# Altium PCB 400902.PcbDoc (part 2 of 2)
Units mm, origin at the board's own origin, x right, y up, seen from the top; angles counter-clockwise.
Board outline 45.72 x 50.8 mm, 4 copper layers (Top Layer, Mid-Layer 1, Mid-Layer 2, Bottom Layer), stack 1.564 mm thick; 61 components, 50 nets, 204 pads, 509 vias.
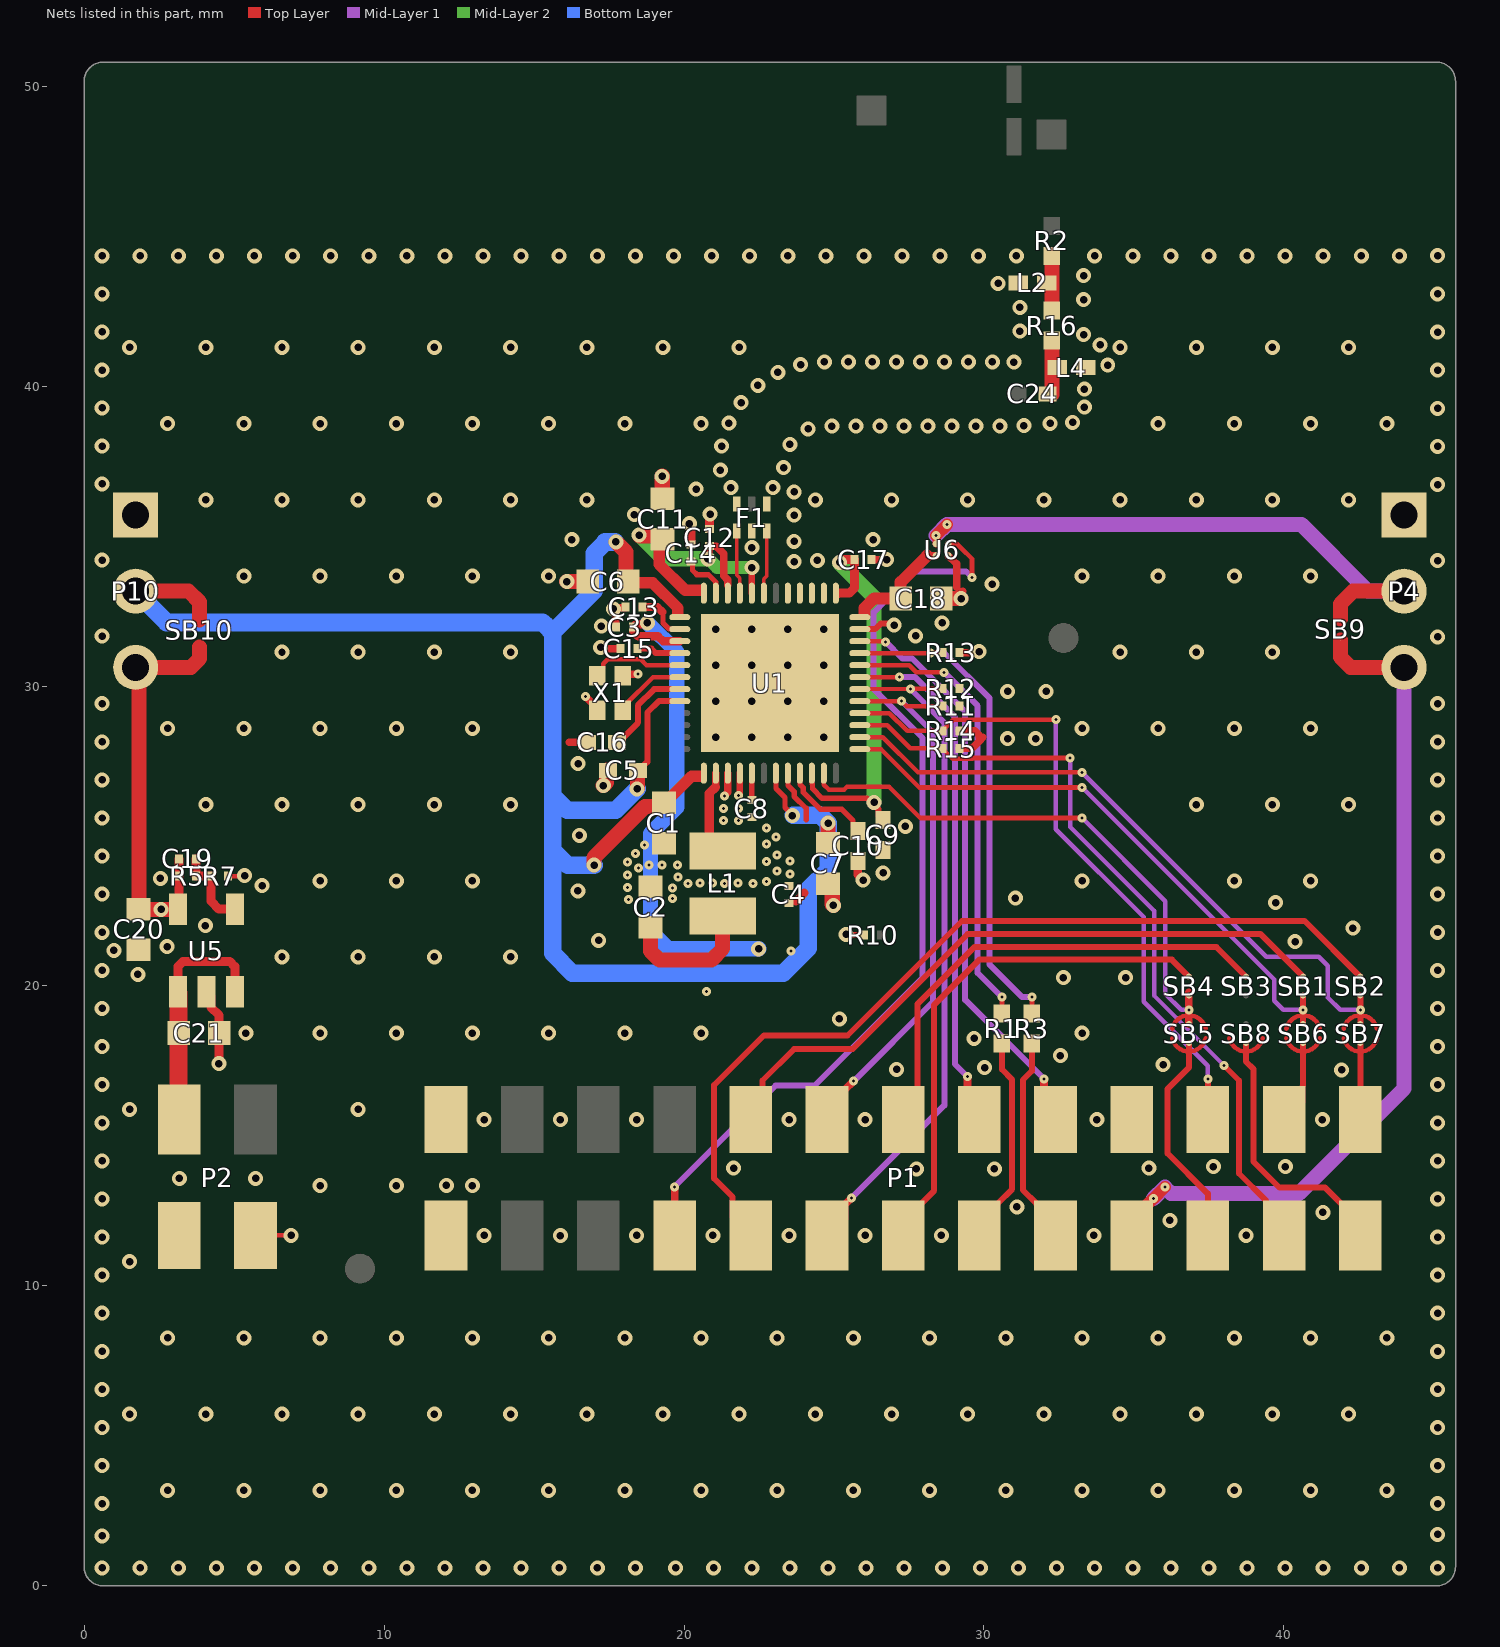
[diagram p4: the nets of this part, all layers, seen from the top]

## Via types
v1: diameter 0.5, hole 0.25, Top Layer to Bottom Layer, tented both sides, 439 vias
v2: diameter 0.3, hole 0.1, Top Layer to Mid-Layer 1, tented both sides, 70 vias

## Nets (pads, with @x,y where several pads share a name; then routed paths per layer and width w, separated by ;. In a path a pad name is that pad's centre, name@x,y a point inside that pad or via, vN(x,y) a via of type N, cw(c..) or ccw(c..) an arc to the next point about the centre after c; other vN are vias at no path point) (continued)
GND: C1.1 C2.1 C3.1 C4.1 C5.1 C6.1 C7.2 C8.2 C9.1 C10.2 C11.1 C12.2 C13.1 C14.1 C15.1 C16.1 C17.1 C18.1 C20.1 C21.1 F1.2 F1.5 F1.7 L2.1 L4.1 P1.2 P1.19 P2.2 P2.4 P4.1 P10.1 R7.1 R10.2 R11.2 R12.2 R13.1 R14.2 R15.2 U1.2 U1.3 U1.4 U1.5 U1.27 U1.28 U1.47 U1.49 U5.2 U6.B1 X1.2 X1.4 | length 21.3
  Top Layer w0.15: P2.4@5.715,11.684 v1(6.905,11.684)
  Top Layer w0.152: R7.1@4.803,23.665 5.343,23.665 v1@5.368,23.69
  Top Layer w0.2: v1(25.403,21.719) 25.415,21.706 25.988,21.706 R10.2@26.001,21.694 ; U1.47@25.86,31.895 26.371,31.895 26.553,32.076 26.959,32.076 v1(27.008,32.027)
  Top Layer w0.229: v2(21.82,26.355) 21.83,26.355 21.86,26.385 U1.28@21.86,27.095
  Top Layer w0.25: 16.18,28.121 C16.1@16.643,28.121 ; v2(16.719,29.65) 16.719,29.642 17.106,29.255 X1.2@17.156,29.255 ; C3.1@17.733,31.959 17.723,31.969 17.723,32.428 17.644,32.508 v1(17.644,32.575) 17.669,32.601 18.036,32.601 18.046,32.611 C13.1@18.046,32.626 ; X1.4@17.964,30.397 v2(18.46,30.397) ; v2(21.355,26.336) 21.355,26.349 21.46,26.454 U1.27@21.46,27.095 ; C10.2@25.794,24.167 25.781,24.153 25.781,23.713 ; C10.2@25.812,24.271 25.812,23.744 25.781,23.713 ; v1(25.969,23.525) 25.781,23.713 ; C17.1@26.256,34.217 v1(26.753,34.217) ; U6.B1@28.808,34.344 29.084,34.068 29.084,33.3 ; R15.2@29.179,27.925 29.609,27.925 29.89,28.206 29.89,28.254 29.845,28.299 ; R14.2@29.179,28.503 29.688,28.503 29.787,28.405 ; v1(29.235,32.917) 29.283,32.965 29.283,33.142 v1@29.297,33.155 ; R13.1@29.243,31.114 29.805,31.114 v1(29.837,31.145) ; 29.787,28.405 29.893,28.299 29.96,28.299
  Top Layer w0.254: v1(17.221,31.292) 17.268,31.245 C15.1@17.877,31.245
  Top Layer w0.3: U5.2@4.075,19.8 4.225,19.65 4.225,19.291 4.5,19.016 4.5,17.422 v1(4.493,17.415)
  Top Layer w0.305: v1(20.181,35.411) 20.181,35.358 20.23,35.31 20.23,34.78 C14.1@20.232,34.778 ; C12.2@20.848,35.274 20.848,35.713 v1(20.868,35.733)
  Top Layer w0.508: v1(16.092,33.481) C6.1@16.786,33.481 ; v1(17.311,26.683) 17.416,26.788 17.416,27.187 17.42,27.191 C5.1@17.462,27.191 ; v1(19.272,36.991) 19.272,36.252 C11.1@19.285,36.238 ; C7.2@24.796,23.408 24.821,23.408 24.942,23.287 24.942,22.727 v1(24.983,22.686) ; C18.1@28.573,32.917 v1(29.235,32.917)
  other v1: 0.6,0.6 1.87,0.6 3.14,0.6 4.41,0.6 5.68,0.6 6.95,0.6 8.22,0.6 9.49,0.6 10.76,0.6 12.03,0.6 13.3,0.6 14.57,0.6 15.84,0.6 17.11,0.6 18.38,0.6 19.72,0.6 20.99,0.6 22.26,0.6 23.53,0.6 24.8,0.6 26.07,0.6 27.34,0.6 28.61,0.6 29.88,0.6 31.15,0.6 32.42,0.6 33.69,0.6 34.96,0.6 36.23,0.6 37.5,0.6 38.77,0.6 40.04,0.6 41.31,0.6 42.58,0.6 43.85,0.6 45.12,0.6 0.6,1.67 45.12,1.72 0.6,2.74 45.12,2.74 2.788,3.187 5.328,3.187 7.868,3.187 10.408,3.187 12.948,3.187 15.488,3.187 18.028,3.187 20.568,3.187 23.108,3.187 25.648,3.187 28.188,3.187 30.728,3.187 33.268,3.187 35.808,3.187 38.348,3.187 40.888,3.187 43.428,3.187 0.6,4.01 45.12,4.01 0.6,5.28 45.12,5.28 1.518,5.727 4.058,5.727 6.598,5.727 9.138,5.727 11.678,5.727 14.218,5.727 16.758,5.727 19.298,5.727 21.838,5.727 24.378,5.727 26.918,5.727 29.458,5.727 31.998,5.727 34.538,5.727 37.078,5.727 39.618,5.727 42.158,5.727 0.6,6.55 45.12,6.55 0.6,7.82 45.12,7.82 2.788,8.267 5.328,8.267 7.868,8.267 10.408,8.267 12.948,8.267 15.488,8.267 18.028,8.267 20.568,8.267 23.108,8.267 25.648,8.267 28.188,8.267 30.728,8.267 33.268,8.267 35.808,8.267 38.348,8.267 40.888,8.267 43.428,8.267 0.6,9.09 45.12,9.09 0.6,10.36 45.12,10.36 1.518,10.807 0.6,11.63 45.12,11.63 15.875,11.675 13.34,11.684 18.42,11.684 20.96,11.684 23.5,11.684 26.04,11.684 28.58,11.684 33.66,11.684 38.74,11.684 36.2,12.184 41.3,12.45 31.095,12.634 0.6,12.9 45.12,12.9 7.868,13.347 10.408,13.347 12.075,13.35 12.948,13.347 3.175,13.584 5.715,13.584 27.75,13.9 30.35,13.9 21.65,13.925 35.5,13.925 37.65,13.975 40.05,13.975 0.6,14.17 45.12,14.17 0.6,15.44 45.12,15.44 13.34,15.545 15.88,15.545 18.42,15.545 23.5,15.545 26.04,15.545 33.76,15.545 41.28,15.545 1.518,15.887 9.138,15.887 0.6,16.71 45.12,16.71 27.088,17.219 41.925,17.2 30.025,17.275 35.975,17.375 32.55,17.675 0.6,17.98 45.12,17.98 29.675,18.25 5.393,18.427 7.868,18.427 10.408,18.427 12.948,18.427 15.488,18.427 18.028,18.427 20.568,18.427 33.268,18.427 25.175,18.9 0.6,19.25 45.12,19.25 32.65,20.275 34.725,20.275 1.795,20.385 0.6,20.52 45.12,20.52 6.598,20.967 9.138,20.967 11.678,20.967 14.218,20.967 0.993,21.19 2.768,21.315 40.375,21.475 17.156,21.517 0.6,21.79 45.12,21.79 42.3,21.925 4.043,22.015 39.725,22.775 31.05,22.925 0.6,23.06 45.12,23.06 16.462,23.167 5.933,23.347 7.868,23.507 10.408,23.507 12.948,23.507 33.268,23.507 38.348,23.507 40.888,23.507 2.543,23.59 5.355,23.677 26.641,23.769 0.6,24.33 45.12,24.33 16.513,25.021 27.381,25.323 0.6,25.6 45.12,25.6 4.058,26.047 6.598,26.047 9.138,26.047 11.678,26.047 14.218,26.047 37.078,26.047 39.618,26.047 42.158,26.047 0.6,26.87 45.12,26.87 16.47,27.415 0.6,28.14 45.12,28.14 30.784,28.249 31.725,28.25 21.06,28.295 22.26,28.295 23.46,28.295 24.66,28.295 2.788,28.587 5.328,28.587 7.868,28.587 10.408,28.587 12.948,28.587 33.268,28.587 35.808,28.587 38.348,28.587 40.888,28.587 0.6,29.41 45.12,29.41 21.06,29.495 22.26,29.495 23.46,29.495 24.66,29.495 30.784,29.819 32.075,29.825 21.06,30.695 22.26,30.695 23.46,30.695 24.66,30.695 6.598,31.127 9.138,31.127 11.678,31.127 14.218,31.127 34.538,31.127 37.078,31.127 39.618,31.127 45.12,31.64 0.6,31.665 27.725,31.675 21.06,31.895 22.26,31.895 23.46,31.895 24.66,31.895 17.242,31.993 28.603,32.109 30.269,33.4 5.328,33.667 7.868,33.667 10.408,33.667 12.948,33.667 15.488,33.667 33.268,33.667 35.808,33.667 38.348,33.667 40.888,33.667 23.669,34.15 45.12,34.18 0.6,34.2 24.444,34.192 22.26,34.615 23.669,34.825 16.259,34.876 26.302,34.878 23.669,35.7 18.344,35.717 4.058,36.207 6.598,36.207 9.138,36.207 11.678,36.207 14.218,36.207 16.758,36.207 24.378,36.207 26.918,36.207 29.458,36.207 31.998,36.207 34.538,36.207 37.078,36.207 39.618,36.207 42.158,36.207 23.669,36.475 20.407,36.56 21.56,36.615 22.96,36.615 45.12,36.715 0.6,36.735 21.211,37.2 23.32,37.279 45.12,37.99 0.6,38 21.254,37.999 23.527,38.052 24.135,38.572 24.93,38.667 25.73,38.667 26.53,38.667 27.33,38.667 28.13,38.667 28.93,38.667 29.73,38.667 30.53,38.667 31.329,38.677 2.788,38.747 5.328,38.747 7.868,38.747 10.408,38.747 12.948,38.747 15.488,38.747 18.028,38.747 20.568,38.747 32.201,38.754 35.808,38.747 38.348,38.747 40.888,38.747 43.428,38.747 21.495,38.762 32.954,38.792 45.12,39.26 0.6,39.27 33.35,39.3 21.9,39.452 33.344,39.9 22.459,40.024 23.13,40.459 0.6,40.535 45.12,40.53 34.126,40.702 23.887,40.717 24.682,40.808 25.482,40.808 26.282,40.808 27.082,40.808 27.882,40.808 28.682,40.808 29.482,40.808 30.282,40.808 30.994,40.798 1.518,41.287 4.058,41.287 6.598,41.287 9.138,41.287 11.678,41.287 14.218,41.287 16.758,41.287 19.298,41.287 21.838,41.287 34.538,41.287 37.078,41.287 39.618,41.287 42.158,41.287 33.875,41.375 33.321,41.713 0.6,41.805 45.12,41.795 31.199,41.829 31.2,42.625 33.318,42.884 0.6,43.07 45.12,43.07 30.469,43.425 33.318,43.684 0.6,44.34 1.87,44.34 3.14,44.34 4.41,44.34 5.68,44.34 6.95,44.34 8.22,44.34 9.49,44.34 10.76,44.34 12.03,44.34 13.3,44.34 14.57,44.34 15.84,44.34 17.11,44.34 18.38,44.34 19.65,44.34 20.92,44.34 22.19,44.34 23.46,44.34 24.73,44.34 26,44.34 27.27,44.34 28.54,44.34 29.81,44.34 31.08,44.34 33.69,44.34 34.96,44.34 36.23,44.34 37.5,44.34 38.77,44.34 40.04,44.34 41.31,44.34 42.58,44.34 43.85,44.34 45.12,44.345
  other v2: 20.755,19.814 23.574,21.16 18.156,22.877 19.608,22.91 18.124,23.287 19.617,23.272 20.128,23.421 20.539,23.433 20.955,23.433 21.355,23.421 21.804,23.433 22.304,23.421 22.754,23.48 19.798,23.635 18.124,23.698 23.531,23.738 23.1,23.839 18.487,23.93 18.839,24.032 19.265,24.032 19.785,24.033 18.124,24.133 22.753,24.144 23.531,24.173 23.1,24.373 18.385,24.413 18.676,24.692 22.754,24.728 23.074,24.968 22.753,25.259 21.324,25.523 21.82,25.523 21.324,25.916 21.82,25.916
GRANT: P1.15 U1.43 | length 17.6
  Top Layer w0.152: U1.43@25.861,30.295 v2(27.191,30.295)
  Top Layer w0.254: v2(29.45,16.975) 29.45,16.34 P1.15@30.245,15.545
  Mid-Layer 1 w0.2: v2(27.191,30.295) 27.705,30.295 29.027,28.974 29.027,25.1 29.027,17.398 v2(29.45,16.975)
IOVDD_nRF70: C18.2 U1.48 U6.A1 | length 3.6
  Top Layer w0.254: 28.106,34.344 U6.A1@28.408,34.344
  Top Layer w0.4: 26.01,32.395 26.01,32.598 26.329,32.917 C18.2@27.223,32.917 27.223,33.462 28.106,34.344
IRQ: P1.17 U1.46 | length 19.5
  Top Layer w0.152: U1.46@25.86,31.495 25.869,31.485 26.709,31.485 v2(26.719,31.475)
  Top Layer w0.254: v2(32.003,16.907) 32.003,16.337 32.785,15.555 P1.17@32.785,15.545
  Mid-Layer 1 w0.2: v2(26.719,31.475) 27.277,30.918 27.606,30.918 29.243,29.281 29.375,29.149 29.375,19.534 v2(32.003,16.907)
MISO/D1: SB2.1 SB7.1 U1.38 | length 22
  Top Layer w0.152: U1.38@25.86,28.295 26.63,28.295 27.799,27.125 29.243,27.125 v2(33.275,27.125)
  Top Layer w0.2: SB7.1@42.545,18.727 42.545,19.02 v2(42.545,19.206) SB2.1@42.545,19.685
  Mid-Layer 1 w0.152: v2(33.275,27.125) 33.275,27.113 39.411,20.977 41.162,20.977 41.466,20.673 41.466,19.617 41.876,19.206 v2(42.545,19.206)
MOSI/D0: SB1.1 SB6.1 U1.37 | length 19.7
  Top Layer w0.152: U1.37@25.86,27.895 26.569,27.895 27.847,26.617 29.243,26.617 v2(33.275,26.617)
  Top Layer w0.203: SB6.1@40.64,18.727 40.64,19.02 v2(40.64,19.206) SB1.1@40.64,19.685
  Mid-Layer 1 w0.152: v2(33.275,26.617) 39.675,20.217 39.675,19.513 39.982,19.206 v2(40.64,19.206)
NetC8_1: C8.1 U1.29 | length 0.9
  Top Layer w0.191: C8.1@22.258,26.201 U1.29@22.26,27.095
  Top Layer w0.254: C8.1@22.258,26.201 C8.1@22.266,26.193
NetC10_1: C10.1 U1.33 | length 3.2
  Top Layer w0.178: U1.33@23.86,27.095 23.864,27.09 23.864,26.718 23.976,26.606 23.976,26.451 24.532,25.895 25.256,25.895 25.633,25.518 25.633,25.328 C10.1@25.794,25.167
NetC13_2: C13.2 U1.14 | length 1.7
  Top Layer w0.178: 19.28,32.465 19.299,32.446 19.299,32.102 19.502,31.899 19.856,31.899 U1.14@19.86,31.895
  Top Layer w0.267: C13.2@18.616,32.626 19.119,32.626 19.28,32.465
NetC15_2: C15.2 U1.16 | length 1.5
  Top Layer w0.203: C15.2@18.447,31.245 18.907,31.245 19.045,31.107 19.072,31.107 19.082,31.096 19.858,31.096 U1.16@19.86,31.095
NetC16_2: C16.2 U1.19 | length 3.2
  Top Layer w0.2: C16.2@17.77,28.121 17.82,28.121 18.446,28.747 18.446,28.767 18.459,28.78 18.459,29.258 18.462,29.261 18.462,29.353 19.003,29.895 U1.19@19.86,29.895
NetC19_2: C19.2 R5.1 R7.2 U5.4 | length 2.8
  Top Layer w0.3: C19.2@3.728,24.24 R5.1@3.728,23.665 R7.2@4.233,23.665 4.233,22.825 4.493,22.565 5.01,22.565 U5.4@5.025,22.55
NetC24_1: C24.1 L4.2 R16.2 | length 1.9
  Top Layer w0.5: C24.1@32.26,39.715 R16.2@32.26,41.565
NetL1_1: L1.1 U1.26 | length 3.4
  Top Layer w0.198: L1.1@20.841,24.954 L1.1@21.289,24.506
  Top Layer w0.254: 21.05,26.629 21.06,26.639 U1.26@21.06,27.095
  Top Layer w0.305: L1.1@20.841,24.954 20.841,26.42 21.05,26.629
  Top Layer w0.381: L1.1@21.219,24.506 L1.1@21.289,24.506
  Top Layer w0.508: L1.1@20.794,24.506 L1.1@21.219,24.506
NetL2_2: L2.2 R2.2 R16.1 | length 1.8
  Top Layer w0.5: R16.1@32.26,42.515 R2.2@32.26,44.365
NetP1_16: P1.16 R1.1 | length 7
  Top Layer w0.2: P1.16@29.845,11.684 29.845,12.144 30.455,12.754 30.466,12.754 30.942,13.229 30.942,16.879 30.6,17.221 R1.1@30.6,18.075
NetP1_18: P1.18 R3.1 | length 7
  Top Layer w0.2: R3.1@31.6,18.075 31.6,17.171 31.299,16.87 31.299,13.193 31.738,12.754 31.775,12.754 32.385,12.144 P1.18@32.385,11.684
NetP1_22: P1.22 SB5.2 | length 7.3
  Top Layer w0.2: SB5.2@36.83,18.103 36.83,17.815 36.83,17.276 36.125,16.571 36.125,14.414 37.465,13.074 P1.22@37.465,11.684
NetP1_23: P1.23 SB6.2 | length 2.8
  Top Layer w0.2: P1.23@40.005,15.545 40.615,16.155 40.615,16.657 40.64,16.682 SB6.2@40.64,18.103
NetP1_25: P1.25 SB7.2 | length 2.6
  Top Layer w0.2: P1.25@42.545,15.545 SB7.2@42.545,18.103
NetP1_26: P1.26 SB8.2 | length 8.9
  Top Layer w0.2: SB8.2@38.735,18.103 38.735,17.815 38.735,17.478 38.977,17.236 38.977,14.148 39.85,13.275 41.375,13.275 41.896,12.754 41.935,12.754 42.545,12.144 P1.26@42.545,11.684
NetP4_2: P4.2 SB9.1 U6.A2 | length 20.2
  Top Layer w0.254: U6.A2@28.408,34.744 v2(28.408,35.022)
  Top Layer w0.4: v2(28.408,35.022) v2(28.767,35.381)
  Top Layer w0.5: SB9.1@41.878,32.235 41.878,32.733 42.305,33.16 P4.2@44.003,33.16
  Mid-Layer 1 w0.5: v2(28.408,35.022) v2(28.767,35.381) 29.243,35.381 40.583,35.381 42.804,33.16 P4.2@44.003,33.16
NetU1_17: U1.17 X1.1 | length 3.4
  Top Layer w0.152: X1.1@16.945,30.458 X1.1@17.125,30.458 ; X1.1@17.114,30.346 17.114,30.458 17.176,30.458 17.313,30.595 17.313,30.742 17.461,30.89 18.553,30.89 18.748,30.695 U1.17@19.86,30.695
NetU1_18: U1.18 X1.3 | length 2.4
  Top Layer w0.152: X1.3@18.046,29.375 18.966,30.295 U1.18@19.86,30.295
  Top Layer w0.165: X1.3@17.851,29.134 X1.3@17.964,29.247
PALDO: C11.2 C12.1 U1.8 U1.10 U1.12 | length 10.6
  Top Layer w0.229: U1.8@22.26,33.095 v1@22.26,34.025
  Top Layer w0.254: v1(20.794,34.243) 20.841,34.29 20.841,34.594 C12.1@20.868,34.62 ; C12.1@20.848,34.662 20.856,34.654 21.073,34.654 21.324,34.403 21.324,33.67 21.46,33.534 U1.10@21.46,33.36
  Top Layer w0.381: C11.2@19.174,34.777 19.174,34.054 20.038,33.191 U1.12@20.57,33.191
  Top Layer w0.508: v1@18.525,35.009 19.164,35.009 C11.2@19.285,34.888 C11.2@19.174,34.777
  Mid-Layer 2 w0.432: 19.231,34.324 19.312,34.243 ; v1(20.794,34.243) 20.813,34.243 21.106,33.95 v1(22.26,33.95)
  Mid-Layer 2 w0.508: v1@18.571,34.984 19.231,34.324 ; 19.312,34.243 v1(20.794,34.243)
  other v1: 18.505,35.03
PWRIOVDD: C9.2 C17.2 U1.1 U1.34 | length 14
  Top Layer w0.178: U1.34@24.26,27.095 24.264,27.09 24.264,26.749 24.271,26.742 24.281,26.733 24.281,26.577 24.602,26.256 26.117,26.256 26.25,26.124 v1(26.337,26.124)
  Top Layer w0.203: v1(26.337,26.124) 26.337,26.043 26.482,25.898 26.482,25.686 C9.2@26.63,25.537
  Top Layer w0.305: 25.16,33.095 25.164,33.099 25.507,33.099 25.686,33.277 C17.2@25.686,34.217 25.304,34.217 25.207,34.12 v1(25.19,34.12)
  Mid-Layer 2 w0.508: v1@25.19,34.106 26.337,32.959 v1(26.337,26.124)
QSPI_D2: P1.24 R15.1 U1.39 | length 26.4
  Top Layer w0.152: U1.39@25.86,28.695 26.775,28.695 27.545,27.925 R15.1@28.609,27.925 28.609,27.91 28.668,27.851 28.683,27.851 28.934,27.6 28.942,27.6 28.965,27.577 29.243,27.577 29.622,27.577 29.645,27.6 v2(32.875,27.6)
  Top Layer w0.2: v2(38,17.35) 38.5,16.85 38.5,13.75 39.395,12.855 39.395,12.294 P1.24@40.005,11.684
  Mid-Layer 1 w0.152: v2(32.875,27.6) 32.875,25.3 35.669,22.506 35.669,19.681 v2(38,17.35)
QSPI_D3: P1.21 R14.1 U1.40 | length 22.4
  Top Layer w0.152: U1.40@25.86,29.095 26.845,29.095 27.436,28.503 R14.1@28.609,28.503 28.609,28.518 28.668,28.577 28.683,28.577 28.975,28.87 29.243,28.87 32.388,28.87 v2(32.397,28.878)
  Top Layer w0.2: v2(37.46,16.907) 37.46,15.55 P1.21@37.465,15.545
  Mid-Layer 1 w0.152: v2(32.397,28.878) 32.397,25.228 35.325,22.3 35.325,19.472 37.46,17.337 v2(37.46,16.907)
REQ: P1.12 R12.1 U1.42 | length 23.1
  Top Layer w0.14: U1.42@25.86,29.895 25.863,29.897 27.547,29.897 v2(27.55,29.9)
  Top Layer w0.152: v2(27.55,29.9) 27.555,29.905 28.604,29.905 R12.1@28.609,29.91
  Top Layer w0.254: P1.12@24.765,11.684 25.348,12.267 25.348,12.693 v2(25.58,12.925)
  Mid-Layer 1 w0.2: v2(25.58,12.925) 28.677,16.021 28.677,25.1 28.677,28.773 v2(27.55,29.9)
SCLK: SB4.1 SB5.1 U1.35 | length 18.6
  Top Layer w0.152: U1.35@24.66,27.095 24.66,26.709 24.821,26.549 25.344,26.549 25.433,26.638 26.835,26.638 27.873,25.6 29.243,25.6 v2(33.275,25.6)
  Top Layer w0.254: SB5.1@36.83,18.727 36.83,19.02 v2(36.83,19.206) SB4.1@36.83,19.685 36.83,19.785
  Mid-Layer 1 w0.152: v2(33.275,25.6) 36.047,22.828 36.047,19.735 36.575,19.206 v2(36.83,19.206)
SPI_CS: P1.13 SB3.2 | length 16.2
  Top Layer w0.2: P1.13@27.305,15.545 27.79,16.03 27.79,19.405 29.681,21.295 37.75,21.295 SB3.2@38.735,20.31
SPI_MISO: P1.10 SB2.2 | length 30.1
  Top Layer w0.2: P1.10@22.225,11.684 21.615,12.294 21.615,12.973 21,13.588 21,16.692 22.658,18.35 25.45,18.35 29.265,22.165 40.689,22.165 SB2.2@42.545,20.31
SPI_MOSI: P1.9 SB1.2 | length 22.1
  Top Layer w0.2: P1.9@22.225,15.545 22.618,15.938 22.618,16.848 23.67,17.9 25.625,17.9 29.45,21.725 39.225,21.725 SB1.2@40.64,20.31
SPI_SCLK: P1.14 SB4.2 | length 17.5
  Top Layer w0.2: P1.14@27.305,11.684 27.305,12.144 28.341,13.18 28.341,19.37 29.846,20.875 36.265,20.875 SB4.2@36.83,20.31
STAT: P1.11 R11.1 U1.41 | length 19
  Top Layer w0.152: U1.41@25.86,29.495 25.869,29.485 27.235,29.485 v2(27.25,29.5) 27.418,29.332 R11.1@28.609,29.332
  Top Layer w0.254: P1.11@24.48,15.37 24.48,15.67 25.348,16.538 25.363,16.538 v2(25.65,16.825)
  Mid-Layer 1 w0.2: v2@25.656,16.825 28.3,19.469 28.3,25.1 28.3,28.45 v2(27.25,29.5)
STATUS1: R3.2 R13.2 U1.45 | length 16.6
  Top Layer w0.152: U1.45@25.86,31.095 28.22,31.095 v2(28.225,31.1) 28.595,31.1 R13.2@28.609,31.114 ; R3.2@31.6,19.075 v2(31.6,19.625)
  Mid-Layer 1 w0.2: v2(28.225,31.1) 28.683,31.1 30.179,29.604 30.179,20.721 31.275,19.625 v2(31.6,19.625)
SW_CTRL0: R1.2 U1.44 | length 15.1
  Top Layer w0.152: U1.44@25.86,30.695 27.505,30.695 27.743,30.457 v2(28.673,30.457) ; R1.2@30.6,19.075 v2(30.6,19.625)
  Mid-Layer 1 w0.2: v2(28.673,30.457) 29.791,29.34 29.791,20.434 v2(30.6,19.625)
SXLDO: C14.2 U1.11 | length 1.6
  Top Layer w0.178: C14.2@20.224,34.14 C14.2@20.232,34.147 ; C14.2@20.247,34.147 20.28,34.114 20.28,33.861 20.428,33.712 20.807,33.712 21.06,33.459 U1.11@21.06,33.095
TXRF0: F1.1 U1.9 | length 2.1
  Top Layer w0.12: F1.1@21.76,35.165 21.76,33.698 21.86,33.598 U1.9@21.86,33.095
TXRF1: F1.3 U1.7 | length 2.1
  Top Layer w0.12: U1.7@22.66,33.095 22.66,33.566 22.76,33.666 F1.3@22.76,35.165
VBAT: C1.2 C5.2 C6.2 C7.1 P10.2 SB10.2 U1.13 U1.20 U1.25 U1.31 | length 66.7
  Top Layer w0.178: U1.31@23.06,27.095 23.064,27.09 23.064,26.587 23.367,26.284 23.367,25.948 v1@23.516,25.799
  Top Layer w0.2: C5.2@18.512,27.191 18.662,27.341 18.662,27.354 18.779,27.471 18.779,29.116 19.158,29.495 U1.20@19.86,29.495
  Top Layer w0.381: C6.2@18.136,33.481 18.284,33.481 18.32,33.445 18.953,33.445 19.798,32.6 19.798,32.395 ; C1.2@19.357,26.101 20.255,26.999 20.506,26.999
  Top Layer w0.5: P10.2@1.618,33.16 P10.2@1.718,33.16 3.485,33.16 3.845,32.8 SB10.2@3.845,32.209
  Top Layer w0.508: v1(16.999,24.032) 16.999,24.278 18.701,25.98 19.211,25.98 C1.2@19.332,26.101 ; v1(17.729,34.801) 18.066,34.465 C6.2@18.066,33.506 ; v1@18.45,26.583 C5.2@18.45,27.18 ; C7.1@24.796,24.758 24.804,24.766 v1(24.804,25.426)
  Bottom Layer w0.584: v1(16.999,24.032) 16.119,24.032 15.621,24.53 ; v1@17.628,34.801 17.378,34.801 17.373,34.797 17.006,34.429 17.006,33.175 15.621,31.79 15.621,27.176 15.621,26.343 ; v1(18.438,26.571) 17.727,25.861 16.104,25.861 15.621,26.343 ; v1@23.649,25.686 24.544,25.686 v1(24.804,25.426) 24.804,23.88 24.143,23.219 24.143,21.263 23.305,20.425 16.281,20.425 15.621,21.085 15.621,24.53 ; 15.621,24.53 15.621,26.343
  Bottom Layer w0.6: P10.2@1.718,33.16 2.753,32.125 15.286,32.125 15.374,32.037 15.621,31.79 ; 17.373,34.797 v1@17.704,34.797
  other v1: 23.61,25.682
VDD_3V6: C19.1 C20.2 P10.3 R5.2 SB10.1 U5.5 | length 13.8
  Top Layer w0.3: U5.5@3.158,22.583 C19.1@3.158,24.24
  Top Layer w0.5: U5.5@3.125,22.55 3.117,22.558 v1(2.568,22.558) 1.825,22.558 1.825,30.412 1.618,30.62 1.825,30.62 3.557,30.62 3.85,30.913 3.85,31.294
VDD_5V: C21.2 P2.1 U5.1 U5.3 | length 8.4
  Top Layer w0.2: P2.1@3.175,15.085 P2.1@3.175,15.545
  Top Layer w0.3: U5.1@3.125,19.8 3.125,20.646 3.301,20.822 4.849,20.822 5.025,20.646 U5.3@5.025,19.8 U5.3@5.035,19.79
  Top Layer w0.6: U5.1@3.15,19.763 3.15,15.57 P2.1@3.175,15.545
VDD_BUCK: C2.2 C3.2 C4.2 L1.2 U1.15 U1.32 | length 24
  Top Layer w0.178: U1.32@23.46,27.095 23.464,27.09 23.464,26.687 23.671,26.48 23.671,26.322 24.07,25.924 24.07,25.537
  Top Layer w0.279: C3.2@18.303,31.959 18.303,31.965 18.402,32.064 18.68,32.064 18.716,32.1 18.716,32.113 18.722,32.106 v1(18.782,32.106) v1@18.74,32.064 ; C3.2@18.307,31.821 18.473,31.655 19.139,31.655 19.3,31.495 U1.15@19.86,31.495 ; 23.729,22.823 24.014,23.108
  Top Layer w0.5: C2.2@18.887,21.957 18.887,21.16 19.18,20.867 20.913,20.867 21.289,21.243 L1.2@21.289,22.336
  Bottom Layer w0.508: v1(18.782,32.106) 19.761,31.127 19.761,25.959 18.885,25.083 18.885,21.837 19.485,21.238 v1(22.488,21.238) v1@22.492,21.238
VDD_IO: P1.1 P1.20 P4.3 SB9.2 | length 29
  Top Layer w0.4: P1.20@34.925,11.684 35.435,12.194 P1.20@35.435,12.604 ; P1.20@35.335,12.604 v2(35.646,12.916) ; v2@35.654,12.916 v2(36.029,13.291)
  Top Layer w0.5: SB9.2@41.878,31.535 41.878,30.967 42.225,30.62 P4.3@44.003,30.62
  Mid-Layer 1 w0.5: v2(35.646,12.916) 35.654,12.916 v2(36.029,13.291) 36.24,13.08 40.505,13.08 44.003,16.578 P4.3@44.003,30.62
VDDIOEN: P1.8 U6.B2 | length 31.2
  Top Layer w0.152: U6.B2@28.808,34.744 29.095,34.744 29.243,34.597 29.6,34.239 v2(29.6,33.625)
  Top Layer w0.254: v2(19.675,13.3) 19.675,13.288 19.685,13.278 P1.8@19.685,11.684
  Mid-Layer 1 w0.2: v2(19.675,13.3) 23.05,16.675 24.35,16.675 27.95,20.275 27.95,25.1 27.95,28.269 26.323,29.897 26.323,32.45 27.697,33.824 29.243,33.824 29.401,33.824 v2(29.6,33.625)
pads on no net: A1.1 A1.2 A1.3 Fid1.0 Fid2.0 P1.3 P1.4 P1.5 P1.6 P2.3 U1.6 U1.21 U1.22 U1.23 U1.24

## Polygon pours and split planes (outlines as drawn)
GND on Mid-Layer 1 "Mid_Layer_1-GND" (solid, remove dead copper, pour order 7): 0,0 0,50.8 45.72,50.8 45.72,0
GND on Mid-Layer 1 "Mid_Layer_1-GND_BUCK" (solid, pour order 12): 17.894,21.896 18.918,20.872 22.517,20.872 24.014,22.369 24.014,27.176 23.185,28.005 20.951,28.005 20.219,27.273 20.219,26.999 17.894,24.674
GND on Top Layer "Top_Layer-GND" (solid, remove dead copper, pour order 13): 0,0 0,50.8 45.72,50.8 45.72,0
VDD_BUCK on Top Layer "TopLayer-VDD_BUCK" (solid, pour order 11): 17.816,20.58 18.2,20.196 22.541,20.196 23.144,20.8 23.144,21.675 23.353,21.883 23.703,21.883 24.294,22.475 24.294,26.013 23.953,26.013 23.953,25.387 23.912,25.346 23.912,23.204 23.618,22.91 22.854,22.91 22.853,22.909 22.853,22.91 20.197,22.91 19.569,22.282 18.089,22.282 17.816,22.009
GND on Top Layer "Top Layer-VDD_BUCK" (solid, pour order 8): 21.324,26.624 21.324,26.556 21.16,26.392 21.16,25.44 21.274,25.327 22.484,25.327 22.515,25.297 22.515,23.738 22.448,23.673 20.142,23.673 20.001,23.814 20.001,24.9 19.604,25.297 19.068,25.297 17.96,24.189 17.96,22.767 18.095,22.632 19.593,22.632 19.74,22.779 19.74,22.783 20.117,23.16 22.555,23.16 22.555,23.15 22.629,23.077 23.604,23.077 23.755,23.228 23.755,24.423 23.581,24.597 23.406,24.597 23.234,24.768 23.234,25.432 22.85,25.816 22.075,25.816 21.984,25.907 21.984,26.624
GND on Bottom Layer "Bottom_Layer-GND" (solid, remove dead copper, pour order 6): 0,0 0,50.8 45.72,50.8 45.72,0
GND on Mid-Layer 2 "Mid_Layer_2-GND" (solid, remove dead copper, pour order 10): 0,0 0,50.8 45.72,50.8 45.72,0

## Other copper
Top Layer:
  region net GND: 19.642,25.259 20.001,24.9 20.001,23.814 20.142,23.673 22.448,23.673 22.527,23.752 22.527,25.242 22.515,25.242 22.515,25.296 22.484,25.327 21.274,25.327 21.16,25.44 21.16,26.351 21.25,26.441 21.273,26.468 21.295,26.505 21.304,26.526 21.335,26.513 21.336,26.624 21.585,26.624 21.585,26.513 21.622,26.529 21.66,26.552 21.699,26.528 21.746,26.509 21.746,26.624 21.975,26.625 21.974,26.396 21.984,26.38 21.984,25.907 22.075,25.816 22.849,25.816 22.922,25.744 22.928,25.724 22.946,25.69 22.965,25.667 22.981,25.651 22.981,25.521 22.983,25.497 22.995,25.457 23.011,25.427 23.033,25.401 23.234,25.2 23.234,24.768 23.406,24.597 23.582,24.597 23.755,24.423 23.755,23.228 23.604,23.077 22.629,23.077 22.555,23.15 22.555,23.16 20.117,23.16 19.593,22.632 18.095,22.631 17.96,22.767 17.96,24.189 19.03,25.259
  region net NetL2_2: 32.757,44.687 31.757,44.687 31.757,42.165 32.757,42.165
  region net NetC24_1: 32.76,41.865 31.76,41.865 31.76,39.314 32.76,39.314
  region net ANT: 30.785,40.238 30.785,39.238 31.46,39.238 31.46,40.238
  region net ANT: 22.641,37.041 22.385,36.395 22.385,36.065 22.135,36.065 22.135,36.395 21.879,37.041 21.879,37.311 22.641,37.311
  pour cut-out: 32.984,44.775 31.531,44.775 31.531,39.006 32.989,39.006
  pour cut-out: 21.16,35.615 23.294,35.615 23.294,33.4 21.169,33.4
  pour cut-out: 23.755,27.512 23.755,26.402 24.279,25.877 24.279,24.916 24.279,22.522 23.651,21.893 23.295,21.893 23.125,21.723 23.125,20.837 22.661,20.373 18.353,20.373 17.915,20.811 17.915,24.181 18.993,25.259 19.978,25.259 20.819,26.1 20.819,27.39 20.819,27.734 20.537,27.734 20.532,27.255 17.562,24.285 17.562,21.164 17.562,20.644 18.062,20.144 22.844,20.144 23.252,20.552 23.381,20.681 23.381,21.221 24.579,22.42 24.579,22.591 24.579,24.814 24.579,25.907 24.019,26.468 24.019,27.512
  pour cut-out: 19.978,23.012 19.724,22.758 19.724,22.66 19.952,22.66 19.978,22.686
  pour cut-out: 24.016,27.359 24.016,27.595 23.816,27.795 20.557,27.795 20.539,27.812 20.539,27.349 20.773,27.349 20.864,27.441 23.76,27.441 23.76,27.349 24.014,27.349
  pour cut-out: 17.794,22.863 18.106,22.573 20.179,22.573 20.179,22.203 18.01,22.203 17.797,21.989 17.559,21.989 17.559,22.863
  pour cut-out: 16.567,31.024 18.762,31.024 18.762,28.502 16.24,28.502 16.24,31.024
  region net ANTWIFI: 32.757,48.89 31.757,48.89 31.757,44.992 32.757,44.992
Mid-Layer 1:
  pour cut-out: 21.51,36.9 21.51,37.365 cw(c24.633,37.365) 24.633,40.488 32.227,40.488 cw(c32.227,39.738) 32.977,39.738 cw(c32.227,39.738) 32.227,38.987 24.633,38.987 ccw(c24.633,37.365) 23.011,37.365 23.011,36.9 cw(c22.26,36.9)
  pour cut-out: 43.379,19.3 36.009,19.3 36.009,20.676 43.379,20.676
  pour cut-out: 32.984,44.775 31.531,44.775 31.531,38.987 32.989,38.987
  pour cut-out: 4.545,31.184 3.178,31.184 3.178,32.409 4.545,32.409
  pour cut-out: 42.558,31.275 41.192,31.275 41.192,32.5 42.558,32.5
  pour cut-out: 20.654,28.242 20.92,27.976 20.206,27.262 20.206,27.004 17.841,24.639 17.841,21.914 18.915,20.84 22.485,20.84 24.016,22.372 24.016,27.207 24.296,27.207 24.296,22.095 22.677,20.476 18.71,20.476 17.528,21.658 17.528,24.782 19.952,27.207 19.952,27.541
  pour cut-out: 24.296,27.131 24.296,27.359 23.649,28.006 23.432,27.789 23.432,27.753 24.016,27.169 24.016,27.131
Mid-Layer 2:
  pour cut-out: 21.51,36.9 21.51,37.365 cw(c24.633,37.365) 24.633,40.488 32.227,40.488 cw(c32.227,39.738) 32.977,39.738 cw(c32.227,39.738) 32.227,38.987 24.633,38.987 ccw(c24.633,37.365) 23.011,37.365 23.011,36.9 cw(c22.26,36.9)
  pour cut-out: 32.984,44.775 31.531,44.775 31.531,38.99 32.989,38.99
Bottom Layer:
  pour cut-out: 21.51,36.9 21.51,37.365 cw(c24.633,37.365) 24.633,40.488 32.227,40.488 cw(c32.227,39.738) 32.977,39.738 cw(c32.227,39.738) 32.227,38.987 24.633,38.987 ccw(c24.633,37.365) 23.011,37.365 23.011,36.9 cw(c22.26,36.9)
  pour cut-out: 32.984,44.775 31.531,44.775 31.531,38.988 32.989,38.988
Multi-Layer:
  pour cut-out: 45.72,50.865 45.72,44.615 0,44.615 0,50.865

## Silkscreen, mask and mechanical layers (free items; w line width, h text height)
Top Overlay:
  drawing of 24 lines, arcs and shapes, not listed
  text "nRF7002-EBII" at 1.044,41.55 h2.5
  text "VBAT" at 2.626,25.1 h1.5 r90
  text "VDDIO" at 44.803,24.1 h1.5 r90
  text "SPI" at 32.25,19.275 h1.5
  text "QSPI" at 32.25,17.625 h1.5
Bottom Overlay:
  drawing of 399 lines, arcs and shapes, not listed
  text ".PCBNumber" at 44.895,49.243 h2
  text ".PCBRevision" at 44.927,48.042 h1.36
  text "GND" at 5.599,35.218 h1.6
  text "GND" at 43.024,35.218 h1.6
  text "VBAT" at 6.113,32.679 h1.6
  text "VDDIO" at 43.025,32.678 h1.6
  text "P3V6" at 5.721,30.149 h1.6
  text "VDD" at 43.025,30.139 h1.6
  text "P2" at 7.241,18.61 h2.03
  text "P1" at 43.982,18.612 h2.03
  text "GND" at 2.812,13.776 h1.6 r270
  text "GND" at 5.342,13.776 h1.6 r270
  text "GND" at 11.622,13.776 h1.6 r270
  text "N.C." at 14.136,13.775 h1.6 r270
  text "N.C." at 16.651,13.775 h1.6 r270
  text "VIOEN" at 19.24,13.775 h1.6 r270
  text "MISO" at 21.754,13.775 h1.6 r270
  text "REQ" at 24.294,13.775 h1.6 r270
  text "SCLK" at 26.883,13.775 h1.6 r270
  text "N.C." at 29.374,13.775 h1.6 r270
  text "N.C." at 31.886,13.775 h1.6 r270
  text "VDD" at 34.446,13.775 h1.6 r270
  text "Q_SCK" at 37.164,13.776 h1.6 r270
  text "Q_D2" at 39.712,13.776 h1.6 r270
  text "Q_CS" at 42.361,13.776 h1.6 r270
  text "5V0" at 2.822,9.008 h1.6 r270
  text "N.C." at 5.352,9.008 h1.6 r270
  text "VDD" at 11.622,9.008 h1.6 r270
  text "N.C." at 14.133,9.008 h1.6 r270
  text "N.C." at 16.644,9.008 h1.6 r270
  text "BCKEN" at 19.239,9.009 h1.6 r270
  text "MOSI" at 21.754,9.008 h1.6 r270
  text "STAT" at 24.294,9.008 h1.6 r270
  text "CS" at 26.863,9.009 h1.6 r270
  text "GRNT" at 29.374,9.009 h1.6 r270
  text "IRQ" at 31.886,9.008 h1.6 r270
  text "GND" at 34.446,9.009 h1.6 r270
  text "Q_D3" at 37.171,9.009 h1.6 r270
  text "Q_D0" at 39.712,9.009 h1.6 r270
  text "Q_D1" at 42.36,9.009 h1.6 r270
Top Solder:
  lines w2.2: 22.293,37.756 22.293,37.756
Board Outline:
  the board outline again, w0.152
Top Impedance Info:
  region: 32.741,41.865 31.741,41.865 31.741,39.314 32.741,39.314
  region: 32.738,44.687 31.738,44.687 31.738,42.165 32.738,42.165
  region: 30.766,40.238 30.766,39.238 31.441,39.238 31.441,40.238
  region: 22.622,37.041 22.366,36.395 22.366,36.065 22.116,36.065 22.116,36.395 21.86,37.041 21.86,37.311 22.622,37.311
  lines w0.12: 21.741,35.165 21.741,33.759 21.841,33.659 21.841,33.095 ; 22.641,33.095 22.641,33.651 22.741,33.751 22.741,35.165
  lines w1: 22.241,37.365 cw(c24.613,37.365) 24.613,39.738 30.925,39.738
  text "50 Ohm single coplanar impedance top" at 11.625,42.425 h1.2
  text "50 Ohm single impedance top-mid1" at 23.225,32.6 h1.2

## Dimensions
0,0.635 to 12.065,11.684 on Dimensions
5.715,11.684 to 12.065,11.684 on Dimensions
0,0.635 to 3.175,11.684 on Dimensions
0.636,50.8 to 0.635,0 on Dimensions
0,0.635 to 45.72,0.635 on Dimensions